# Altium PCB LCR.PcbDoc
Units mil, origin at the board's own origin, x right, y up, seen from the top; angles counter-clockwise.
Board outline 1311 x 1811 mil, 2 copper layers (Top Layer, Bottom Layer), stack 10.517 mil thick; 74 components, 47 nets, 251 pads, 77 vias.
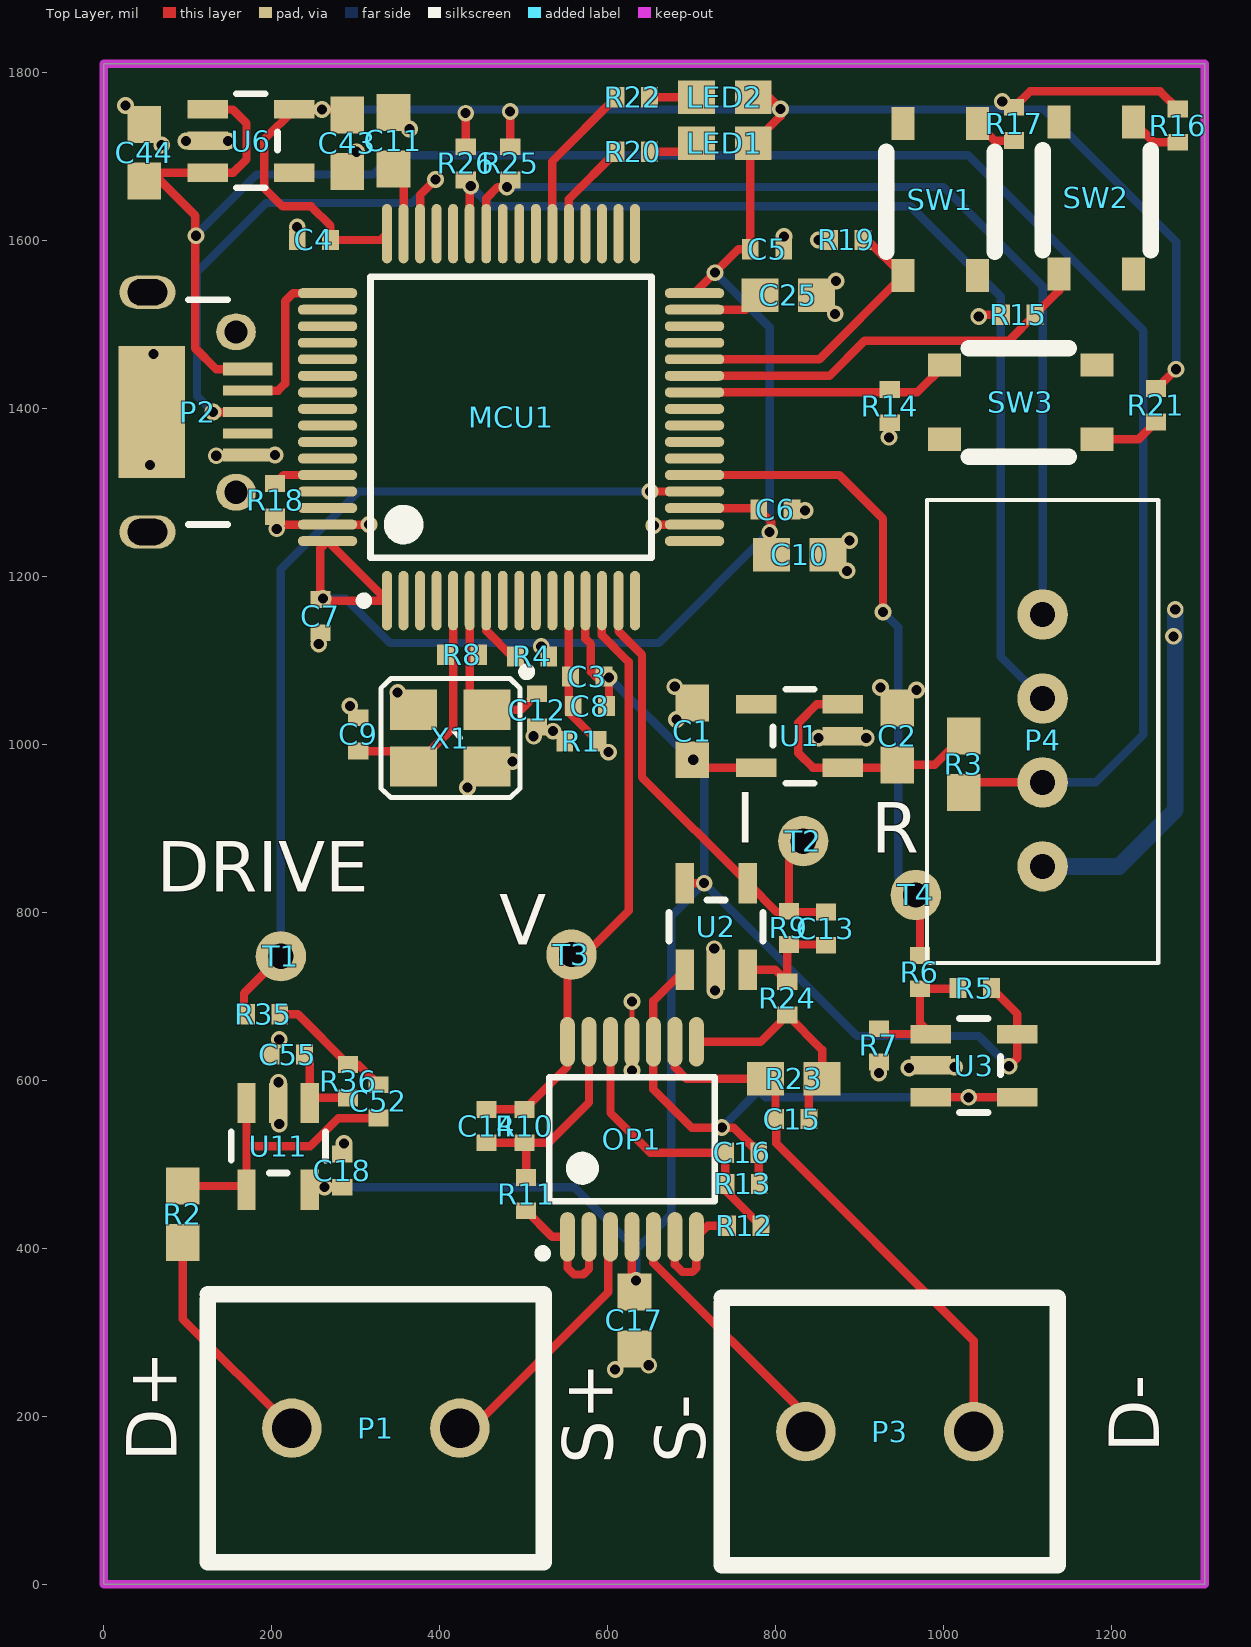
[diagram p0: Top Layer view]
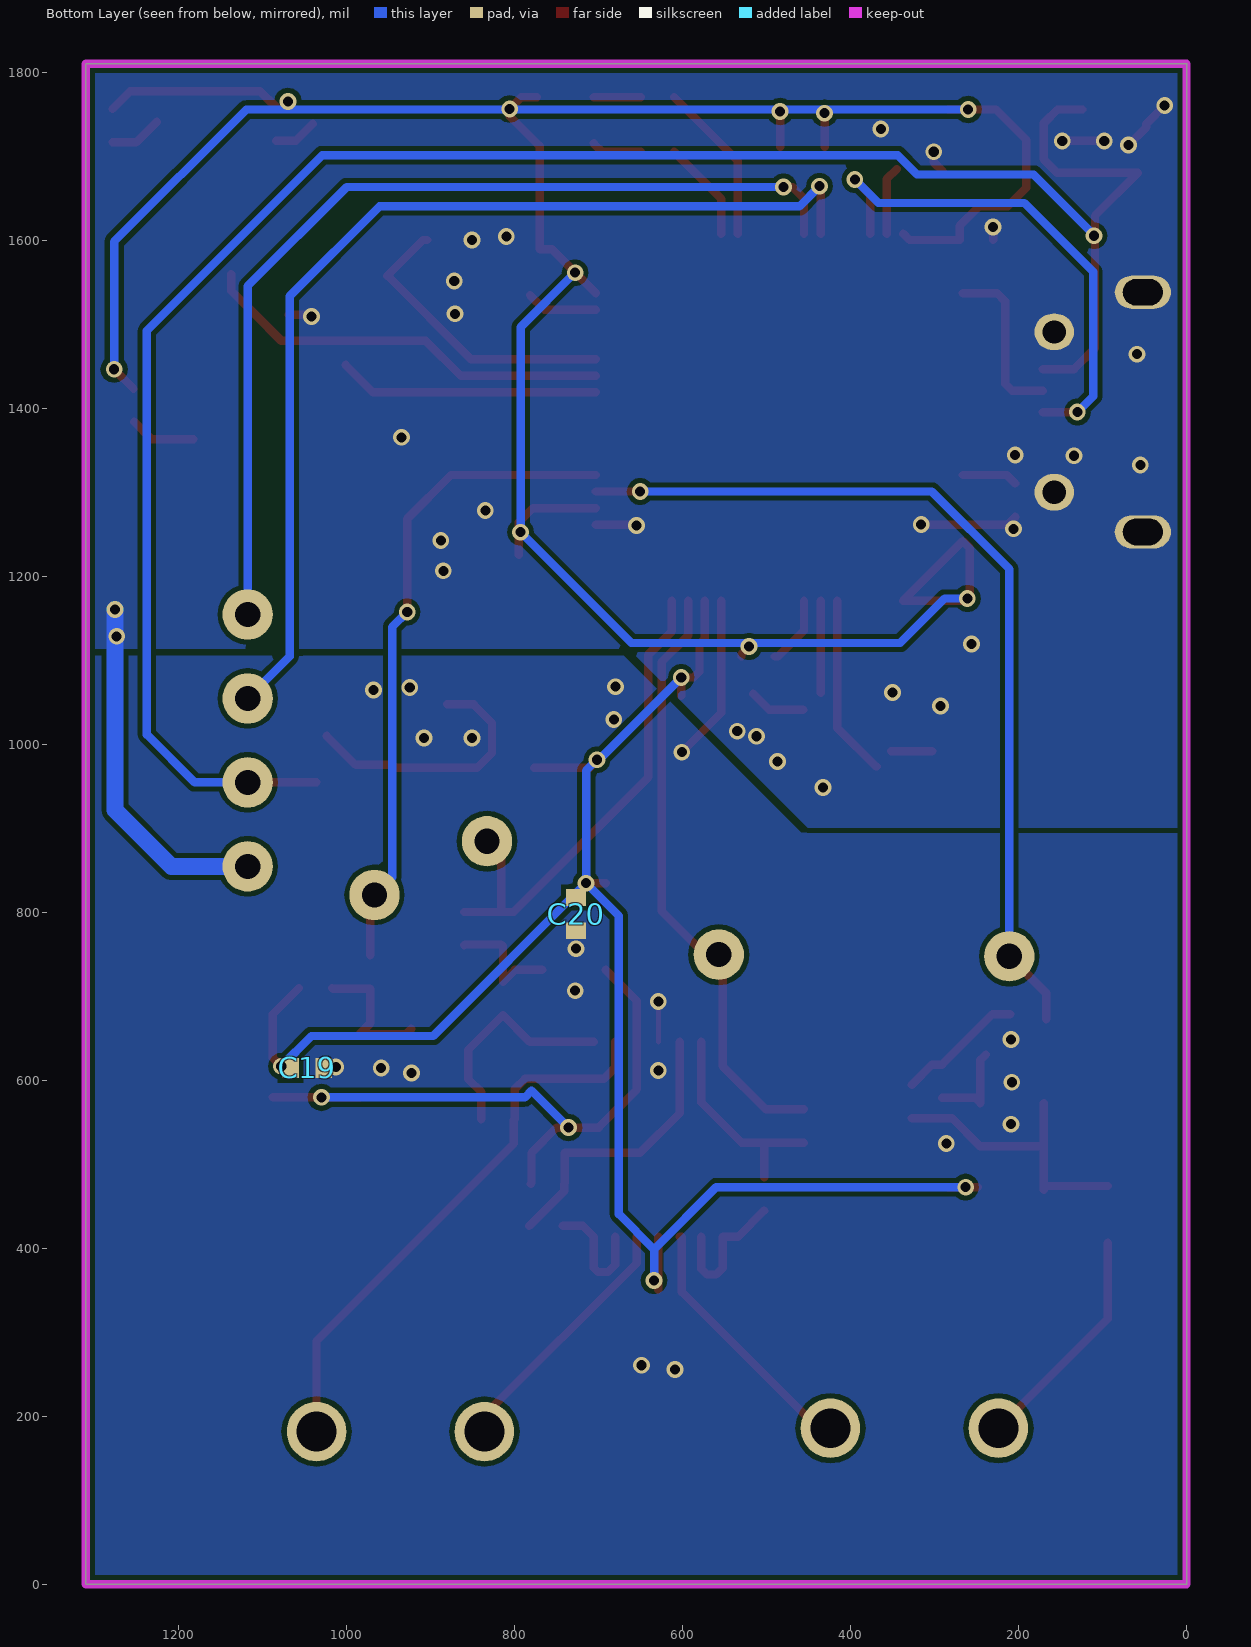
[diagram p1: Bottom Layer view, seen from below]

## Layer stack, top to bottom
Top Solder: solder mask 0.4, Solder Resist, Dk 3.5
Top Layer: signal copper 1.4
Dielectric 1: core 7.7165, FR-4, Dk 4.2
Bottom Layer: signal copper 1.4
Bottom Solder: solder mask 0.4, Solder Resist, Dk 3.5

## Board outline
0,0 1311,0 1311,1811 0,1811

## Design rules (kind name [scope] priority, off if disabled: settings)
Clearance PowerPour [InPolygon AND (InNet('1.8D') OR InNet('1.2') OR InNet('3.3D'))] p1: gap=6
Clearance "50R trace" [InNetClass('50R') vs InPolygon] p2: gap=20
Clearance [All] p3: gap=6
DiffPairsRouting USB_HS [InNet('USB_HS_P')     or InNet('USB_HS_N')] p1: maxlimit=10 minlimit=5.98 mostfreqgap=5.98 toplayer_minwidth=10 toplayer_maxwidth=15 toplayer_prefwidth=15 bottomlayer_minwidth=10 bottomlayer_maxwidth=15 bottomlayer_prefwidth=15 maxuncoupledlength=500
DiffPairsRouting [All] p2: maxlimit=10 minlimit=5.98 mostfreqgap=7.99 toplayer_minwidth=5.98 toplayer_maxwidth=15 toplayer_prefwidth=10 bottomlayer_minwidth=5.98 bottomlayer_maxwidth=15 bottomlayer_prefwidth=10 maxuncoupledlength=500
HoleToHoleClearance [All] p1: gap=7.87 allowstackedmicrovias=TRUE
MatchedLengths HDMI_TMDS [InNetClass('TMDS')] p1: tolerance=39.37 checknetsindiffpair=TRUE checkdiffpairvsdiffpair=TRUE checkothers=FALSE
MatchedLengths LCD_LVDS [InNetClass('LCD_LVDS')] p2: tolerance=50 checknetsindiffpair=TRUE checkdiffpairvsdiffpair=TRUE checkothers=FALSE
MinimumSolderMaskSliver [All] p1 off: minsoldermaskwidth=10
PlaneClearance [All] p1: clearance=6
PlaneConnect [All] p1: planeconnectstyle=Direct reliefexpansion=20 reliefentries=4 reliefconductorwidth=10 reliefairgap=10
PolygonConnect [All] p1: connectstyle=Direct reliefconductorwidth=10 reliefentries=4 polygonreliefangle="90 Angle" airgapwidth=10
RoomDefinition power [InComponentClass('power')] p1 off: confinementstyle=ConfineIn formatcopy=TRUE lockcomponents=FALSE outline 1809,55 2785,55 2785,322 1809,322
RoomDefinition mcu [InComponentClass('mcu')] p2 off: confinementstyle=ConfineIn formatcopy=TRUE lockcomponents=FALSE outline 1522,2167 6545,2167 6545,2809 1522,2809
RoomDefinition front_end [InComponentClass('front_end')] p3 off: confinementstyle=ConfineIn formatcopy=TRUE lockcomponents=FALSE outline 2651,355 4102,355 4102,1053 2651,1053
RoutingVias [All] p1: holewidth=12 width=20 viastyle="Through Hole" minholewidth=12 minwidth=20 maxholewidth=28 maxwidth=50
ShortCircuit ShortCircuit_NoNet [not InAnyNet vs not InAnyNet] p1: allowed=TRUE
ShortCircuit [not InNet('No Net') vs not InNet('No Net')] p2: allowed=FALSE
SilkToBoardRegionClearance [All] p1 off:
SilkToSilkClearance [All] p1 off: silktosilkclearance=10
SilkToSolderMaskClearance [IsPad] p1 off: minsilkscreentomaskgap=10 clearancetoexposedcopper=TRUE
SolderMaskExpansion [All] p1: expansion=2
UnpouredPolygon [All] p1: allowunpoured=FALSE
Width Width_1 [InNetClass('50R')] p1: maxlimit=29.61 minlimit=9.13 preferedwidth=25.2 toplayer_maxwidth=12.99 toplayer_prefwidth=10.91 bottomlayer_minwidth=21.42 impedancedriven=TRUE minimp=45.000000 maximp=55.000000 favimp=50.000000
Width [All] p2: maxlimit=60 minlimit=6 preferedwidth=6
20 further rules are at their usual default settings.

## Classes and differential pairs
component class front_end: C13 C14 C15 C16 C17 C18 C19 C20 C52 C55 OP1 P1 P3 R2 R5 R6 R7 R9 R10 R11 R12 R13 R23 R24 R35 R36 T1 T2 T3 T4 U2 U3 U11
component class power: C1 C2 C43 C44 R3 U1 U6
component class mcu: C3 C4 C5 C6 C7 C8 C9 C10 C11 C12 C25 LED1 LED2 MCU1 P2 P4 R1 R4 R8 R14 R15 R16 R17 R18 R19 R20 R21 R22 R25 R26 SW1 SW2 SW3 X1

## Components (designator, comment, footprint, x,y, rotation, side; value= is the part's Value field where it differs from the comment)
C1 "4.7uF" 0603 701,1016 r270 top
C2 "4.7uF" 0603 945,1010 r270 top
C3 "1n" 0402 576,1081 r180 top
C4 "0.1uF * 4" 0402 250,1601 r0 top
C5 "1n" 0402 790,1590 r180 top
C6 "1n" 0402 800,1280 r180 top
C7 "1n" 0402 258,1153 r90 top
C8 "1n" 0402 579,1046 r180 top
C9 "22pF" 0402 303,1012 r90 top
C10 "4.7uF" 0603 829,1226 r180 top
C11 "2.2uF" 0603 345,1719 r90 top
C12 "22pF" 0402 516,1041 r270 top
C13 "NC" 0402 860,781 r270 top
C14 "NC" 0402 456,546 r270 top
C15 "NC" 0402 820,554 r180 top
C16 "430pF" 0402 760.32,514 r180 top
C17 "4.7uF" 0603 632,314 r90 top
C18 "0.1uF" 0402 284,493 r270 top
C19 "0.1uF" 0402 1047,615 r0 bottom
C20 "0.1uF" 0402 727,798 r90 bottom
C25 "2.2uF" 0603 815,1535 r0 top
C43 "4.7uF" 0603 290,1716 r90 top
C44 "4.7uF" 0603 48,1705 r270 top
C52 "430pF" 0402 327,575 r90 top
C55 "100pF" 0402 219,631 r0 top
LED1 "LED0" 0603 740,1716 r180 top
LED2 "LED0" 0603 740,1771 r180 top
MCU1 "STM32F103R8T6" LQFP64_N 485,1390 r90 top
OP1 "MCP6024" TSSOP14_44MM_065P 629,530 r90 top
P1 "" 5.08-2P 324,186 r0 top
P2 "SWD_MicroUSB" MICRO-YZX -59,1396 r270 top
P3 "" 5.08-2P 936,182 r0 top
P4 "UART/I2C" 4pSocket 1118,1055 r270 top
R1 "0R" 0402 569,1004 r180 top
R2 "100" 0603 94,441 r270 top
R3 "100" 0603 1024,977 r270 top
R4 "10k" 0402 510,1105 r0 top
R5 "NC" 0402 1037,710 r0 top
R6 "100" 0402 972,729 r90 top
R7 "NC" 0402 923,642 r270 top
R8 "" 0402 427,1107 r180 top
R9 "10k" 0402 816,782 r270 top
R10 "1k" 0402 501,546 r270 top
R11 "1k" 0402 503,465 r270 top
R12 "1k" 0402 763,427 r180 top
R13 "1k" 0402 761,477 r180 top
R14 "10k" 0402 936,1403 r90 top
R15 "10k" 0402 1089,1512 r0 top
R16 "1k" 0402 1279,1737 r90 top
R17 "1k" 0402 1084,1739 r90 top
R18 "10k" 0402 204,1291 r90 top
R19 "10k" 0402 884,1601 r0 top
R20 "10k" 0402 630,1706 r0 top
R21 "1k" 0402 1253,1404 r90 top
R22 "10k" 0402 630,1771 r0 top
R23 "10k" 0603 822,602 r180 top
R24 "1k" 0402 814,698 r270 top
R25 "10k" 0402 484,1692 r90 top
R26 "10k" 0402 431,1692 r90 top
R35 "787R" 0402 190,679 r180 top
R36 "1.33k" 0402 291,599 r90 top
SW1 "SW-PB" SW3x4 996,1649 r90 top
SW2 "SW-PB" SW3x4 1182,1651 r90 top
SW3 "SW-PB" SW3x4 1092,1408 r0 top
T1 "" TestPad 211,748 r180 top
T2 "" TestPad 833,885 r0 top
T3 "" TestPad 557,750 r0 top
T4 "" TestPad 967,821 r270 top
U1 "RT9013-28GB" SOT23-5 829,1010 r90 top
U2 "OP-SOT23" SOT23-5 729,783 r0 top
U3 "OP-SOT23" SOT23-5 1036,618 r270 top
U6 "RT9013-28GB" SOT23-5 175,1719 r270 top
U11 "OP-SOT23" SOT23-5 208,522 r180 top
X1 "8mhz" OSCILLATOR-3.2X2.5 413,1008 r180 top

## Footprints (in the part's own frame and the unit in brackets; to place one, negate y for a bottom-side part, rotate by r counter-clockwise, add the part's x,y. Pads: shape width x height; smd on the part's side, far side on the other; paste and mask are expansions set on the pad)
4pSocket [mil]
  round 60 hole 30: 1(-100,0) 2(0,0) 3(100,0) 4(200,0)
  silkscreen extent -236,-138 315,138
5.08-2P [mm]
  round 1.8 hole 1.2: 1(-2.54,0) 2(2.54,0)
  silkscreen extent -5.08,-4.05 5.08,4.05
0402 [mil] "0402-RES"
  rect 20x24 smd: 1(-19.68,0) 2(20,0)
0603 [mil] "0603-RES"
  rect 44x40 smd: 1(-33.46,0) 2(34,0)
LQFP64_N [mm]
  oval 1.8x0.3 smd: 1(-5.55,3.75) 2(-5.55,3.25) 3(-5.55,2.75) 4(-5.55,2.25) 5(-5.55,1.75) 6(-5.55,1.25) 7(-5.55,0.75) 8(-5.55,0.25) 9(-5.55,-0.25) 10(-5.55,-0.75) 11(-5.55,-1.25) 12(-5.55,-1.75) 13(-5.55,-2.25) 14(-5.55,-2.75) 15(-5.55,-3.25) 16(-5.55,-3.75) 33(5.55,-3.75) 34(5.55,-3.25) 35(5.55,-2.75) 36(5.55,-2.25) 37(5.55,-1.75) 38(5.55,-1.25) 39(5.55,-0.75) 40(5.55,-0.25) 41(5.55,0.25) 42(5.55,0.75) 43(5.55,1.25) 44(5.55,1.75) 45(5.55,2.25) 46(5.55,2.75) 47(5.55,3.25) 48(5.55,3.75)
  oval 0.3x1.8 smd: 17(-3.75,-5.55) 18(-3.25,-5.55) 19(-2.75,-5.55) 20(-2.25,-5.55) 21(-1.75,-5.55) 22(-1.25,-5.55) 23(-0.75,-5.55) 24(-0.25,-5.55) 25(0.25,-5.55) 26(0.75,-5.55) 27(1.25,-5.55) 28(1.75,-5.55) 29(2.25,-5.55) 30(2.75,-5.55) 31(3.25,-5.55) 32(3.75,-5.55) 49(3.75,5.55) 50(3.25,5.55) 51(2.75,5.55) 52(2.25,5.55) 53(1.75,5.55) 54(1.25,5.55) 55(0.75,5.55) 56(0.25,5.55) 57(-0.25,5.55) 58(-0.75,5.55) 59(-1.25,5.55) 60(-1.75,5.55) 61(-2.25,5.55) 62(-2.75,5.55) 63(-3.25,5.55) 64(-3.75,5.55)
  silkscreen extent -5.67,-4.25 4.25,4.57
MICRO-YZX [mm]
  rect 0.4x1.5 smd: 1(-1.3,5.85) 5(1.3,5.85)
  rect 0.3x1.5 smd: 2(-0.65,5.85) 3(0,5.85) 4(0.65,5.85)
  oval 1x1.7 hole 0.8 slot 1.2 at 90 deg: 5(-3.625,2.82) 5(3.625,2.82)
  oval 1.1x1.2 hole 0.7: 5(-2.425,5.5) 5(2.425,5.5)
  rect 4x2 smd: 5(0,2.95)
  silkscreen extent -3.4,4.05 3.4,5.25, body extent -4.02,0.33 3.98,5.93, height 2.6
OSCILLATOR-3.2X2.5 [mil] "OSCILLATOR-3.2X2.5"
  rect 56x48 smd: 1(-43.31,-33.46) 2(44,-33.46) 3(44,34) 4(-43.31,34)
  silkscreen extent -95,-83 83,71
SOT23-5 [mil] "SOT23-5"
  rect 22x48 smd: 1(-37.4,-51.19) 2(0,-51.19) 3(38,-51.19) 4(38,52) 5(-37.4,52)
  silkscreen extent -56,-17 56,32
SW3x4 [mm]
  rect 1x0.7 smd: 1(-2.3,1.125) 2(2.3,-1.125) 3(2.3,1.125) 4(-2.3,-1.125)
  silkscreen extent -1.58,-1.65 1.45,1.63, body extent -2,-1.5 2,1.5, height 2.6
TestPad [mil]
  round 60 hole 30: 1(0,0)
TSSOP14_44MM_065P [mm]
  oval 1.5x0.45 smd: 1(-2.95,1.95) 2(-2.95,1.3) 3(-2.95,0.65) 4(-2.95,0) 5(-2.95,-0.65) 6(-2.95,-1.3) 7(-2.95,-1.95) 8(2.95,-1.95) 9(2.95,-1.3) 10(2.95,-0.65) 11(2.95,0) 12(2.95,0.65) 13(2.95,1.3) 14(2.95,1.95)
  silkscreen extent -3.57,-2.5 1.88,2.82

## Part data
C1 C2 C43 C44: library part Cap, "Capacitor"
C3 C4 C5 C6 C7 C8 C9 C10 C11 C12 C13 C14 C15 C16 C17 C18 C19 C20 C25 C52 C55: library part CAP0402-CAP, "<b>Capacitor</b> / Standard 0603 ceramic capacitor, and 0.1\" leaded capacitor."
LED1 LED2: "Typical INFRARED GaAs LED"
MCU1: "STM32 ARM-based 32-bit MCU with 64 Kbytes Flash, 64-pin LQFP, Industrial Temperature"
OP1: library part OP-SOP14
P1 P3: library part 2P
P2: "Connector SMD USB Micro Type B middle mount"
P4: library part 4PSocket
R1 R2 R3 R4 R5 R6 R7 R8 R9 R10 R11 R12 R13 R14 R15 R16 R17 R18 R19 R20 R21 R22 R23 R24 R25 R26 R35 R36: library part Res2, "Resistor"
SW1 SW2 SW3: "Switch"
T1 T2 T3 T4: library part TestPad
U1 U6: library part LP5907
X1: library part OSCILLATOR-3.2X2.5, "Crystal Oscillator in 3.2x2.5 SMD"

## Via types
v1: diameter 20, hole 12, Top Layer to Bottom Layer, 77 vias

## Nets (pads, with @x,y where several pads share a name; then routed paths per layer and width w, separated by ;. In a path a pad name is that pad's centre, name@x,y a point inside that pad or via, vN(x,y) a via of type N, cw(c..) or ccw(c..) an arc to the next point about the centre after c; other vN are vias at no path point)
3.3A: C1.2 C3.1 C8.1 C17.2 C18.2 C19.2 C20.2 MCU1.13 OP1.4 R5.2 U1.5 U2.5 U3.5 U11.5 | length 2100.3
  Top Layer w10: U11.5@248.4,473 v1(263,473) C18.2 ; MCU1.13 573.58,1126.1 580,1119.68 580,1087 587,1080 v1(601.68,1080) 601.68,1058 ; C17.2@629,351 OP1.4 ; U2.5 v1(715,835) ; C1.2 710.4,972.6 U1.5 ; R5.2 1088,679 U3.5 1088,627 v1(1078,617)
  Bottom Layer w10: v1(263,473) 560,473 634,399 ; v1(601.68,1080) 699.68,982 v1(702,982) 715,969 v1(715,835) ; v1(634,362) 634,399 ; v1(1078,617) 1042,653 897,653 v1(715,835) ; 634,399 676,441 676,796 v1(715,835)
3.3D: C4.2 C5.2 C6.2 C7.2 C10.2 C43.2 LED1.1 LED2.1 MCU1.1 MCU1.19 MCU1.32 MCU1.48 MCU1.64 R4.2 R16.2 R17.2 R21.2 R25.2 R26.2 U6.5 | length 3567.4
  Top Layer w10: C7.2 258,1233.87 MCU1.64 MCU1.1 C7.2@259.5,1171.5 ; C43.2@283.6,1756.4 v1(260,1756.4) U6.5 191,1720.4 191,1663 213,1641 247,1641 270,1618 C4.2 329.86,1601 MCU1.48 ; R26.2 v1(431,1752) ; R25.2 v1(484,1754) ; v1(521,1117) 530,1108 R4.2 ; MCU1.19 778.27,1281.73 C6.2 795,1265 C10.2 ; MCU1.32 755.87,1590 C5.2 770,1712.54 LED1.1 806,1748.54 v1(806,1757) 792,1771 LED2.1 ; R17.2 1103,1778 1258,1778 R16.2 ; R21.2@1254,1424 v1(1277,1447)
  Bottom Layer w10: v1(260,1756.4) 1119.6,1756.4 1277,1599 v1(1277,1447) ; v1(261,1174) 288,1174 341,1121 517,1121 661,1121 v1(793,1253) 793,1497 v1(728,1562)
  other v1: 1070,1766
5V: C44.2 P2.1 P4.3 R3.2 U6.1 U6.3 | length 2478.9
  Top Layer w10: U6.1 153.6,1756.4 170,1740 170,1697 154,1681 U6.3 58,1681 109,1630 109,1472 133.82,1447.18 P2.1 ; R3.2@1036,955 P4.3
  Bottom Layer w10: v1(110,1606) 110,1607 182,1679 321,1679 344,1702 1029,1702 1238,1493 1238,1012 1181,955 P4.3
AGND: C1.1 C2.1 C3.2 C8.2 C17.1 C18.1 C19.1 C20.1 C55.1 MCU1.12 OP1.11 R1.1 R7.2 U1.2 U2.2 U3.2 U11.2 | length 247.9
  Top Layer w6: OP1.11 v1(629,694)
  Top Layer w10: MCU1.12 553.9,1038.1 v1(601,991)
  other v1: 609,256 649,261 286,525 209,548 208,598 923,609 629,612 959,615 1013,616 209,649 728,707 727,757 851,1008 908,1008 682,1030 968,1065 925,1068 680,1069
GND: C4.1 C5.1 C6.1 C7.1 C9.2 C10.1 C11.2 C12.2 C25.2 C43.1 C44.1 MCU1.18 MCU1.63 P2.5 P4.4 R1.2 R14.1 R15.1 R18.1 R19.1 U6.2 X1.2 X1.4 | length 772.9
  Top Layer w10: v1(26,1761) 48,1739 C44.1 48,1735 v1(69,1714) ; v1(98,1719) U6.2 v1(148,1719) ; R18.1 213.27,1262.05 MCU1.63 v1(315.95,1262.05) ; C4.1 v1(230.32,1616.31) ; C43.1 301,1693.54 v1(301,1706) ; v1(655,1261) 656.05,1262.05 MCU1.18 ; v1@1044,1512 R15.1
  Bottom Layer w20: P4.4 1209,855 1276,922 v1(1276,1161)
  other v1: 433,949 487,980 512,1010 535,1016 293,1046 350,1062 256,1120 1274,1129 885,1207 888,1243 206,1257 835,1279 55,1333 134,1344 204,1345 935,1366 59,1465 1042,1510 871,1513 872,1552 851,1601 810,1605 364,1733
NetC2_2: C2.2 R3.1 U1.1 U1.3 | length 318.2
  Top Layer w10: U1.3 849,1048 827,1026 827,990 844.4,972.6 U1.1 941.6,972.6 C2.2 989.54,976 R3.1
NetC9_1: C9.1 MCU1.5 R8.2 X1.3 | length 266.3
  Top Layer w10: C9.1 X1.3@351.68,992.32 ; X1.3 370,974 416.1,1020.1 MCU1.5
NetC11_1: C11.1 MCU1.47 | length 82
  Top Layer w10: C11.1 357.05,1673.49 MCU1.47
NetC12_1: C12.1 MCU1.6 R8.1 X1.1 | length 177.2
  Top Layer w10: X1.1@435.79,1061.98 MCU1.6 ; X1.1 496.78,1041.46 C12.1
NetC13_1: C13.1 MCU1.15 R9.1 T2.1 U2.4 | length 573.8
  Top Layer w10: MCU1.15 612.95,1135.05 641,1107 641,961 U2.4 801.32,800.68 C13.1 ; R9.1 T2.1@816,868
NetC13_2: C13.2 R9.2 R24.1 U2.3 | length 142.4
  Top Layer w10: U2.3 799.87,731.81 R24.1 814,760 R9.2 859,762 C13.2
NetC14_1: C14.1 MCU1.14 OP1.14 R10.1 T3.1 | length 715.3
  Top Layer w10: C14.1 R10.1 552.23,616.91 OP1.14 552.23,729.23 625,802 625,1098.54 593.27,1130.27 MCU1.14
NetC14_2: C14.2 OP1.13 R10.2 R11.1 | length 253.3
  Top Layer w10: C14.2 R10.2 530,526 577.82,573.82 OP1.13 ; R11.1 R10.2@503,524
NetC15_1: C15.1 OP1.8 R23.1 R24.2 | length 269.1
  Top Layer w10: OP1.8 782.14,646.14 R24.2 855.46,636.54 R23.1 839.68,586.22 C15.1
NetC15_2: C15.2 OP1.9 P3.2 R23.2 | length 666.6
  Top Layer w10: OP1.9 680.18,615.82 694,602 R23.2 800,590 C15.2 801,553 801,525 1036,290 P3.2
NetC16_2: C16.2 OP1.12 R12.1 R13.2 | length 345.7
  Top Layer w10: OP1.12 603.41,561.59 651,514 C16.2 740.32,477.68 R13.2 741,468.68 R12.1
NetC25_1: C25.1 MCU1.31 | length 85.1
  Top Layer w10: MCU1.31 764.49,1517.95 C25.1
NetC52_1: C52.1 R2.1 U11.3 U11.4 | length 345.7
  Top Layer w10: R2.1 U11.4@165.54,474.46 ; U11.4 170,521.59 ; U11.3 170,521.59 ; C52.1 279.32,555.32 245.59,521.59 170,521.59
NetC52_2: C52.2 R35.1 R36.2 | length 152.1
  Top Layer w10: R35.1 231,679 R36.2 303,619 C52.2
NetC55_2: C55.2 R36.1 U11.1 | length 108.6
  Top Layer w10: C55.2 245.4,624.6 U11.1 251.53,579.32 R36.1
NetLED1_2: LED1.2 R20.2 | length 60.1
  Top Layer w10: R20.2 696,1706 LED1.2
NetLED2_2: LED2.2 R22.2 | length 56
  Top Layer w10: R22.2 LED2.2
NetMCU1_7: MCU1.7 R4.1 | length 83.3
  Top Layer w10: MCU1.7 455.47,1135.77 486.24,1105 R4.1
NetMCU1_16: MCU1.16
NetMCU1_17: MCU1.17
NetMCU1_20: MCU1.20 R35.2 T1.1 | length 1085
  Top Layer w10: R35.2@167,673 167,704 T1.1 ; v1(650.58,1301.42) MCU1.20
  Bottom Layer w10: T1.1 211,1209 303.42,1301.42 v1(650.58,1301.42)
NetMCU1_21: MCU1.21 R6.2 T4.1 | length 784.3
  Top Layer w10: MCU1.21 875.9,1321.1 928,1269 v1(928,1158) ; T4.1 972,816 R6.2
  Bottom Layer w10: v1(928,1158) 946,1140 946,842 T4.1
NetMCU1_26: MCU1.26 R14.2 SW3.1 | length 311.5
  Top Layer w10: MCU1.26 968.69,1419.53 SW3.1
NetMCU1_27: MCU1.27 R15.2 SW2.1 | length 496
  Top Layer w10: MCU1.27 864.21,1439.21 906,1481 1078,1481 R15.2 1137.71,1540.71 SW2.1
NetMCU1_28: MCU1.28 R19.2 SW1.1 | length 354.8
  Top Layer w10: MCU1.28 852.16,1458.9 SW1.1 909.16,1601 R19.2
NetMCU1_37: MCU1.37 R20.1 | length 120.9
  Top Layer w10: MCU1.37 553.9,1649.58 R20.1
NetMCU1_38: MCU1.38 R22.1 | length 194
  Top Layer w10: MCU1.38 534.21,1694.9 R22.1
NetMCU1_60: MCU1.60 R18.2 | length 66.7
  Top Layer w10: R18.2 214.1,1321.1 MCU1.60
NetOP1_1: OP1.1 OP1.2 R11.2 | length 168.9
  Top Layer w10: R11.2 534.14,413.86 OP1.1 552.23,376.77 560,369 571,369 577.82,375.82 OP1.2
NetOP1_3: OP1.3 P1.2 | length 312.4
  Top Layer w10: P1.2 439,186 601,348 601,413.86 OP1.3
NetOP1_5: OP1.5 P3.1 | length 287.4
  Top Layer w10: OP1.5 654.59,382.97 P3.1@836,201.56
NetOP1_6: OP1.6 OP1.7 R12.2 | length 144
  Top Layer w10: OP1.6 680.18,380.82 689,372 701,372 705.77,376.77 OP1.7 718.91,427 R12.2
NetP1_1: P1.1 R2.2 | length 274.8
  Top Layer w10: R2.2 94,316 P1.1
NetR5_1: R5.1 R6.1 R7.1 U3.1 | length 169.2
  Top Layer w10: R7.1 929.28,655.4 U3.1 972,668.22 R6.1 1016.63,709.32 R5.1
NetR16_1: R16.1 SW2.2 | length 62.7
  Top Layer w10: SW2.2 1250.53,1717.31 R16.1
NetR17_1: R17.1 SW1.2 | length 52.1
  Top Layer w10: SW1.2 1060.53,1719.31 R17.1
NetR21_1: R21.1 SW3.2 | length 79
  Top Layer w10: SW3.2 1232.39,1363.71 R21.1
PA9: MCU1.42 P4.1 R25.1 | length 1150
  Top Layer w10: MCU1.42 455.47,1650.47 469,1664 v1(480,1664)
  Bottom Layer w10: v1(480,1664) 1000,1664 1118,1546 P4.1
PA10: MCU1.43 P4.2 R26.1 | length 1242
  Top Layer w10: MCU1.43 435.79,1663.79 v1(437,1665)
  Bottom Layer w10: v1(437,1665) 461,1641 961,1641 1068,1534 1068,1105 P4.2
PA13: MCU1.46 P2.3 | length 617.8
  Top Layer w10: v1(130,1396) P2.3 ; MCU1.46 376.73,1654.73 v1(395,1673)
  Bottom Layer w10: v1(130,1396) 111,1415 111,1563 193,1645 367,1645 v1(395,1673)
PA14: MCU1.49 P2.2 | length 200.7
  Top Layer w10: P2.2 207.59,1421.59 216,1430 216,1528 225.64,1537.64 MCU1.49
VREF: C16.1 OP1.10 R13.1 U2.1 U3.3 U3.4 | length 770.4
  Top Layer w10: U2.1 654.59,694.81 OP1.10 654.59,589.41 700,544 v1(736,544) 750,544 C16.1 780,477.68 R13.1 ; U3.3 U3.4
  Bottom Layer w10: v1(736,544) 780,588 788,580 v1(1030,580)
pads on no net: MCU1.2 MCU1.3 MCU1.4 MCU1.8 MCU1.9 MCU1.10 MCU1.11 MCU1.22 MCU1.23 MCU1.24 MCU1.25 MCU1.29 MCU1.30 MCU1.33 MCU1.34 MCU1.35 MCU1.36 MCU1.39 MCU1.40 MCU1.41 MCU1.44 MCU1.45 MCU1.50 MCU1.51 MCU1.52 MCU1.53 MCU1.54 MCU1.55 MCU1.56 MCU1.57 MCU1.58 MCU1.59 MCU1.61 MCU1.62 P2.4 SW1.3 SW1.4 SW2.3 SW2.4 SW3.3 SW3.4 U1.4 U6.4

## Polygon pours and split planes (outlines as drawn)
AGND on Bottom Layer "Bottom Layer-No Net" (solid, remove dead copper, pour order 5): -205,0 -205,896 -204,895 458,895 459,895 670,1106 1763.5,1106 1763.5,0
GND on Bottom Layer "Bottom Layer-No Net" (solid, remove dead copper, pour order 3): -205,1968.5 1763.5,1968.5 1763.5,1113 1762.5,1114 670,1114 664,1114 470,920 451,901 -206,901

## Keep-outs
Keep-Out Layer:
  the board outline again, w10

## Silkscreen, mask and mechanical layers (free items; w line width, h text height)
Top Overlay:
  text "I" at 752,883 h60
  text "R" at 914,871 h60
  text "DRIVE" at 63,825 h60
  text "V" at 471,762 h60
  text "D-" at 1257,157 h60 r90
  text "D+" at 87,146 h60 r90
  text "S-" at 716,144 h60 r90
  text "S+" at 606,143 h60 r90